# Altium PCB PCB_V0.PcbDoc (part 3 of 4)
Units mm, origin at the board's own origin, x right, y up, seen from the top; angles counter-clockwise.
Board outline 107.95 x 48.89 mm, 4 copper layers (Top Layer, Layer 1, Layer 2, Bottom Layer), stack 1.586 mm thick; 377 components, 276 nets, 880 pads, 284 vias.
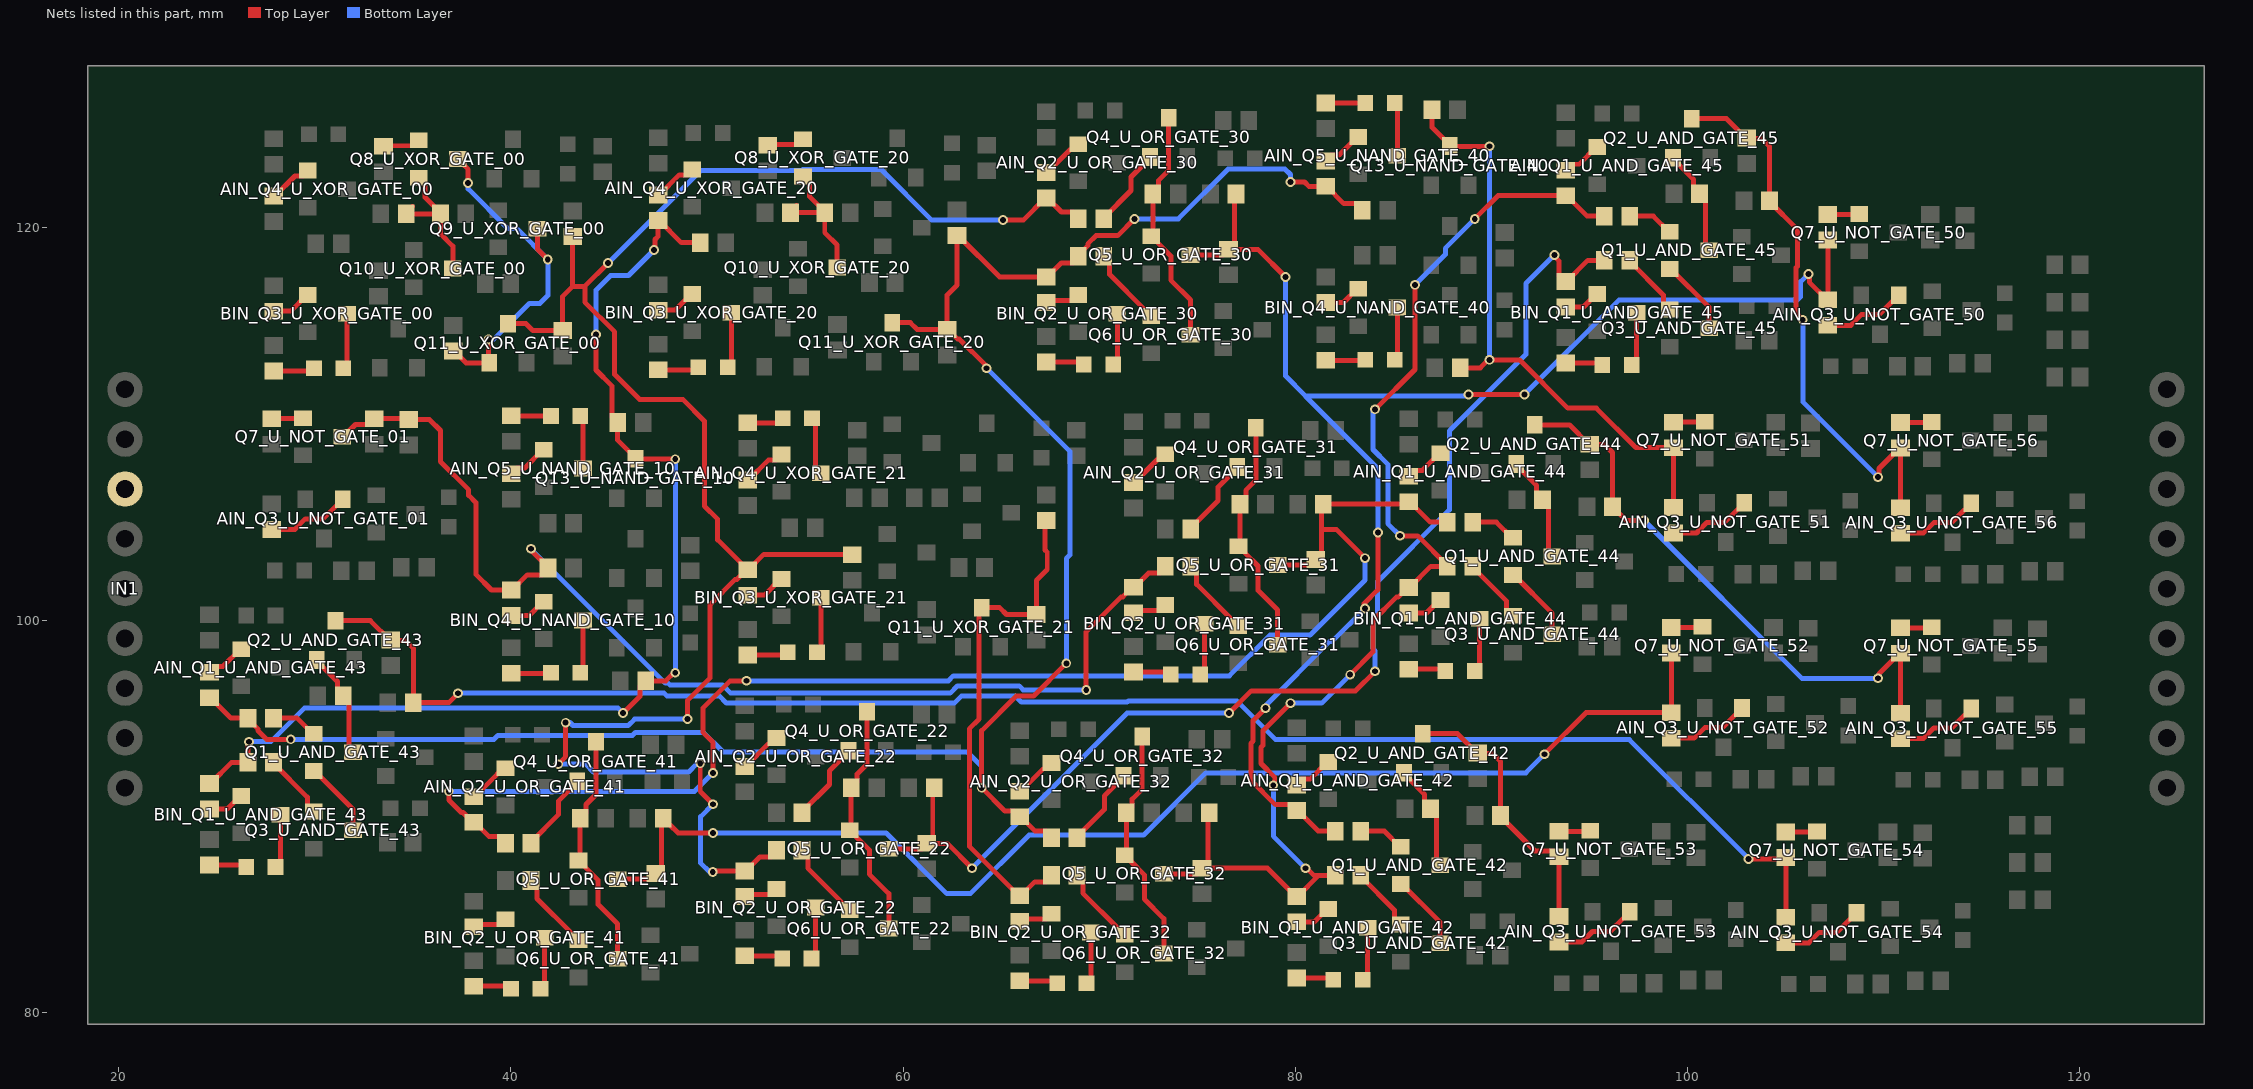
[diagram p5: the nets of this part, all layers, seen from the top]

## Via types
v1: diameter 0.5, hole 0.3, Top Layer to Bottom Layer, 284 vias

## Nets (pads, with @x,y where several pads share a name; then routed paths per layer and width w, separated by ;. In a path a pad name is that pad's centre, name@x,y a point inside that pad or via, vN(x,y) a via of type N, cw(c..) or ccw(c..) an arc to the next point about the centre after c; other vN are vias at no path point) (continued)
NetAIN_D4_U_XOR_GATE_21_1: AIN_D4_U_XOR_GATE_21.1 AIN_RD4_U_XOR_GATE_21.2 | length 1.9
  Top Layer w0.254: AIN_RD4_U_XOR_GATE_21.2@52.07,110.058 53.621,110.058 AIN_D4_U_XOR_GATE_21.1@53.86,110.297
NetAIN_D4_U_XOR_GATE_21_2: AIN_D4_U_XOR_GATE_21.2 AIN_Q4_U_XOR_GATE_21.3 | length 3
  Top Layer w0.254: AIN_D4_U_XOR_GATE_21.2@55.36,110.297 55.53,110.127 55.53,107.761 AIN_Q4_U_XOR_GATE_21.3@55.803,107.488
NetAIN_D5_U_NAND_GATE_10_1: AIN_D5_U_NAND_GATE_10.1 AIN_RD5_U_NAND_GATE_10.2 | length 2
  Top Layer w0.254: AIN_RD5_U_NAND_GATE_10.2@40.02,110.412 42.039,110.412 AIN_D5_U_NAND_GATE_10.1@42.043,110.408
NetAIN_D5_U_NAND_GATE_10_2: AIN_D5_U_NAND_GATE_10.2 AIN_Q5_U_NAND_GATE_10.3 | length 2.7
  Top Layer w0.254: AIN_D5_U_NAND_GATE_10.2@43.543,110.408 43.678,110.273 AIN_Q5_U_NAND_GATE_10.3@43.678,107.726
NetAIN_D5_U_NAND_GATE_40_1: AIN_D5_U_NAND_GATE_40.1 AIN_RD5_U_NAND_GATE_40.2 | length 2
  Top Layer w0.254: AIN_RD5_U_NAND_GATE_40.2@81.555,126.37 83.574,126.37 AIN_D5_U_NAND_GATE_40.1@83.578,126.366
NetAIN_D5_U_NAND_GATE_40_2: AIN_D5_U_NAND_GATE_40.2 AIN_Q5_U_NAND_GATE_40.3 | length 2.7
  Top Layer w0.254: AIN_D5_U_NAND_GATE_40.2@85.078,126.366 85.213,126.231 AIN_Q5_U_NAND_GATE_40.3@85.213,123.684
NetAIN_Q1_U_AND_GATE_42_1: AIN_Q1_U_AND_GATE_42.1 AIN_R1_U_AND_GATE_42.1 | length 2.1
  Top Layer w0.254: AIN_R1_U_AND_GATE_42.1@80.075,91.581 80.373,91.879 80.766,91.879 81.642,92.755 AIN_Q1_U_AND_GATE_42.1@81.692,92.755
NetAIN_Q1_U_AND_GATE_43_1: AIN_Q1_U_AND_GATE_43.1 AIN_R1_U_AND_GATE_43.1 | length 2.1
  Top Layer w0.254: AIN_R1_U_AND_GATE_43.1@24.627,97.342 24.925,97.64 25.318,97.64 26.194,98.516 AIN_Q1_U_AND_GATE_43.1@26.244,98.516
NetAIN_Q1_U_AND_GATE_44_1: AIN_Q1_U_AND_GATE_44.1 AIN_R1_U_AND_GATE_44.1 | length 2.1
  Top Layer w0.254: AIN_R1_U_AND_GATE_44.1@85.791,107.335 86.089,107.633 86.482,107.633 87.358,108.509 AIN_Q1_U_AND_GATE_44.1@87.408,108.509
NetAIN_Q1_U_AND_GATE_45_1: AIN_Q1_U_AND_GATE_45.1 AIN_R1_U_AND_GATE_45.1 | length 2.1
  Top Layer w0.254: AIN_R1_U_AND_GATE_45.1@93.795,122.946 94.093,123.244 94.486,123.244 95.362,124.12 AIN_Q1_U_AND_GATE_45.1@95.412,124.12
NetAIN_Q2_U_OR_GATE_22_1: AIN_Q2_U_OR_GATE_22.1 AIN_R2_U_OR_GATE_22.1 | length 2.2
  Top Layer w0.254: AIN_R2_U_OR_GATE_22.1@51.926,92.532 51.976,92.532 53.151,93.707 53.273,93.707 AIN_Q2_U_OR_GATE_22.1@53.546,93.98
NetAIN_Q2_U_OR_GATE_30_1: AIN_Q2_U_OR_GATE_30.1 AIN_R2_U_OR_GATE_30.1 | length 2.2
  Top Layer w0.254: AIN_R2_U_OR_GATE_30.1@67.31,122.824 67.36,122.824 68.535,123.999 68.657,123.999 AIN_Q2_U_OR_GATE_30.1@68.93,124.272
NetAIN_Q2_U_OR_GATE_31_1: AIN_Q2_U_OR_GATE_31.1 AIN_R2_U_OR_GATE_31.1 | length 2.2
  Top Layer w0.254: AIN_R2_U_OR_GATE_31.1@71.754,107.01 71.804,107.01 72.979,108.185 73.101,108.185 AIN_Q2_U_OR_GATE_31.1@73.374,108.458
NetAIN_Q2_U_OR_GATE_32_1: AIN_Q2_U_OR_GATE_32.1 AIN_R2_U_OR_GATE_32.1 | length 2.2
  Top Layer w0.254: AIN_R2_U_OR_GATE_32.1@65.954,91.262 66.004,91.262 67.179,92.437 67.301,92.437 AIN_Q2_U_OR_GATE_32.1@67.574,92.71
NetAIN_Q2_U_OR_GATE_41_1: AIN_Q2_U_OR_GATE_41.1 AIN_R2_U_OR_GATE_41.1 | length 2.2
  Top Layer w0.254: AIN_R2_U_OR_GATE_41.1@38.1,90.989 38.15,90.989 39.325,92.164 39.447,92.164 AIN_Q2_U_OR_GATE_41.1@39.72,92.437
NetAIN_Q3_U_NOT_GATE_01_1: AIN_Q3_U_NOT_GATE_01.1 AIN_R3_U_NOT_GATE_01.1 | length 4.3
  Top Layer w0.254: AIN_R3_U_NOT_GATE_01.1@27.81,104.618 28.977,104.618 29.515,105.156 30.415,105.156 31.092,105.833 31.142,105.833 31.415,106.106 AIN_Q3_U_NOT_GATE_01.1@31.415,106.156
NetAIN_Q3_U_NOT_GATE_50_1: AIN_Q3_U_NOT_GATE_50.1 AIN_R3_U_NOT_GATE_50.1 | length 4.3
  Top Layer w0.254: AIN_R3_U_NOT_GATE_50.1@107.17,115.032 108.337,115.032 108.875,115.57 109.775,115.57 110.452,116.247 110.502,116.247 110.775,116.52 AIN_Q3_U_NOT_GATE_50.1@110.775,116.57
NetAIN_Q3_U_NOT_GATE_51_1: AIN_Q3_U_NOT_GATE_51.1 AIN_R3_U_NOT_GATE_51.1 | length 4.3
  Top Layer w0.254: AIN_R3_U_NOT_GATE_51.1@99.296,104.44 100.463,104.44 101.001,104.978 101.901,104.978 102.578,105.655 102.628,105.655 102.901,105.928 AIN_Q3_U_NOT_GATE_51.1@102.901,105.978
NetAIN_Q3_U_NOT_GATE_52_1: AIN_Q3_U_NOT_GATE_52.1 AIN_R3_U_NOT_GATE_52.1 | length 4.3
  Top Layer w0.254: AIN_R3_U_NOT_GATE_52.1@99.184,93.971 100.351,93.971 100.889,94.509 101.789,94.509 102.466,95.186 102.516,95.186 102.789,95.459 AIN_Q3_U_NOT_GATE_52.1@102.789,95.509
NetAIN_Q3_U_NOT_GATE_53_1: AIN_Q3_U_NOT_GATE_53.1 AIN_R3_U_NOT_GATE_53.1 | length 4.3
  Top Layer w0.254: AIN_R3_U_NOT_GATE_53.1@93.454,83.574 94.621,83.574 95.159,84.112 96.059,84.112 96.736,84.789 96.786,84.789 97.059,85.062 AIN_Q3_U_NOT_GATE_53.1@97.059,85.112
NetAIN_Q3_U_NOT_GATE_54_1: AIN_Q3_U_NOT_GATE_54.1 AIN_R3_U_NOT_GATE_54.1 | length 4.3
  Top Layer w0.254: AIN_R3_U_NOT_GATE_54.1@105.026,83.536 106.193,83.536 106.731,84.074 107.631,84.074 108.308,84.751 108.358,84.751 108.631,85.024 AIN_Q3_U_NOT_GATE_54.1@108.631,85.074
NetAIN_Q3_U_NOT_GATE_55_1: AIN_Q3_U_NOT_GATE_55.1 AIN_R3_U_NOT_GATE_55.1 | length 4.3
  Top Layer w0.254: AIN_R3_U_NOT_GATE_55.1@110.868,93.95 112.035,93.95 112.573,94.488 113.473,94.488 114.15,95.165 114.2,95.165 114.473,95.438 AIN_Q3_U_NOT_GATE_55.1@114.473,95.488
NetAIN_Q3_U_NOT_GATE_56_1: AIN_Q3_U_NOT_GATE_56.1 AIN_R3_U_NOT_GATE_56.1 | length 4.3
  Top Layer w0.254: AIN_R3_U_NOT_GATE_56.1@110.868,104.425 112.035,104.425 112.573,104.963 113.473,104.963 114.15,105.64 114.2,105.64 114.473,105.913 AIN_Q3_U_NOT_GATE_56.1@114.473,105.963
NetAIN_Q4_U_XOR_GATE_00_1: AIN_Q4_U_XOR_GATE_00.1 AIN_R4_U_XOR_GATE_00.1 | length 2.3
  Top Layer w0.254: AIN_R4_U_XOR_GATE_00.1@27.91,121.621 27.96,121.621 28.988,122.649 29.37,122.649 AIN_Q4_U_XOR_GATE_00.1@29.643,122.922
NetAIN_Q4_U_XOR_GATE_20_1: AIN_Q4_U_XOR_GATE_20.1 AIN_R4_U_XOR_GATE_20.1 | length 2.3
  Top Layer w0.254: AIN_R4_U_XOR_GATE_20.1@47.512,121.676 47.562,121.676 48.59,122.704 48.972,122.704 AIN_Q4_U_XOR_GATE_20.1@49.245,122.977
NetAIN_Q4_U_XOR_GATE_21_1: AIN_Q4_U_XOR_GATE_21.1 AIN_R4_U_XOR_GATE_21.1 | length 2.3
  Top Layer w0.254: AIN_R4_U_XOR_GATE_21.1@52.07,107.137 52.12,107.137 53.148,108.165 53.53,108.165 AIN_Q4_U_XOR_GATE_21.1@53.803,108.438
NetAIN_Q5_U_NAND_GATE_10_1: AIN_Q5_U_NAND_GATE_10.1 AIN_R5_U_NAND_GATE_10.1 | length 2.2
  Top Layer w0.254: AIN_R5_U_NAND_GATE_10.1@40.02,107.456 40.318,107.754 40.706,107.754 41.628,108.676 AIN_Q5_U_NAND_GATE_10.1@41.678,108.676
NetAIN_Q5_U_NAND_GATE_40_1: AIN_Q5_U_NAND_GATE_40.1 AIN_R5_U_NAND_GATE_40.1 | length 2.2
  Top Layer w0.254: AIN_R5_U_NAND_GATE_40.1@81.555,123.414 81.853,123.712 82.241,123.712 83.163,124.634 AIN_Q5_U_NAND_GATE_40.1@83.213,124.634
NetAIN_R1_U_AND_GATE_42_2: AIN_R1_U_AND_GATE_42.2 AIN_R3_U_NOT_GATE_50.2 Q5_U_OR_GATE_30.3 R2_U_AND_GATE_42.1 R14_U_NOT_GATE_50.1 RO2_U_OR_GATE_30.1 Y_R2_U_OR_GATE_30.2 | length 77.8
  Top Layer w0.254: Q5_U_OR_GATE_30.3@74.66,118.618 76.316,118.618 Y_R2_U_OR_GATE_30.2@76.6,118.902 ; RO2_U_OR_GATE_30.1@76.978,121.727 76.898,121.647 76.898,119.2 Y_R2_U_OR_GATE_30.2@76.6,118.902 ; v1(78.486,95.504) 77.847,94.865 77.847,93.816 77.743,93.712 77.743,91.819 78.983,90.579 79.777,90.579 AIN_R1_U_AND_GATE_42.2@80.075,90.281 80.125,90.281 81.171,89.235 R2_U_AND_GATE_42.1@82.042,89.235 ; v1(79.502,117.49) 78.09,118.902 Y_R2_U_OR_GATE_30.2@76.6,118.902 ; v1(83.566,100.584) 83.52,100.63 83.52,100.841 84.216,101.537 v1(84.216,104.46) ; v1(88.834,111.506) v1(91.694,111.506) ; v1(106.172,117.648) 106.219,117.601 106.219,117.233 107.12,116.332 AIN_R3_U_NOT_GATE_50.2@107.17,116.332 R14_U_NOT_GATE_50.1@107.17,119.38
  Bottom Layer w0.254: v1(78.486,95.504) 78.486,95.634 81.765,98.913 81.895,98.913 v1(83.566,100.584) ; v1(79.502,117.49) 79.502,112.452 80.518,111.436 ; v1(84.216,104.46) 84.216,107.727 80.518,111.425 80.518,111.436 ; v1(88.834,111.506) 88.764,111.436 80.518,111.436 ; v1(91.694,111.506) 96.52,116.332 105.627,116.332 105.776,116.481 105.776,117.252 v1(106.172,117.648)
NetAIN_R1_U_AND_GATE_43_2: AIN_R1_U_AND_GATE_43.2 AIN_R2_U_OR_GATE_32.2 AIN_R5_U_NAND_GATE_40.2 BIN_R2_U_OR_GATE_30.2 Q11_U_XOR_GATE_20.3 R2_U_AND_GATE_43.1 R11_U_OR_GATE_32.1 R13_U_OR_GATE_30.1 R16_U_XOR_GATE_20.1 R23_U_NAND_GATE_40.1 Y_R4_U_XOR_GATE_20.2 | length 108.4
  Top Layer w0.254: AIN_R1_U_AND_GATE_43.2@24.627,96.042 24.677,96.042 25.723,94.996 R2_U_AND_GATE_43.1@26.594,94.996 26.594,94.946 27.088,94.452 27.088,94.363 27.537,93.914 v1(28.768,93.914) ; Q11_U_XOR_GATE_20.3@59.45,115.168 60.37,115.168 60.72,114.818 R16_U_XOR_GATE_20.1@62.244,114.818 ; v1(64.262,112.842) 64.262,112.939 62.877,114.324 62.788,114.324 62.294,114.818 R16_U_XOR_GATE_20.1@62.244,114.818 ; R11_U_OR_GATE_32.1@67.574,88.895 67.574,88.945 67.276,89.243 66.723,89.243 66.004,89.962 AIN_R2_U_OR_GATE_32.2@65.954,89.962 65.656,90.26 65.188,90.26 v1(64.008,91.44) 64.008,94.36 65.77,96.122 66.658,96.122 v1(68.326,97.79) ; v1(71.804,120.457) 70.948,119.601 69.84,119.601 69.424,119.185 69.424,119.096 68.93,118.602 R13_U_OR_GATE_30.1@68.93,118.552 68.93,118.502 68.632,118.204 68.074,118.204 67.36,117.49 BIN_R2_U_OR_GATE_30.2@67.31,117.49 64.926,117.49 62.802,119.614 Y_R4_U_XOR_GATE_20.2@62.752,119.614 62.752,117.074 62.244,116.566 R16_U_XOR_GATE_20.1@62.244,114.818 ; v1(79.756,122.343) 80.47,122.343 80.699,122.114 AIN_R5_U_NAND_GATE_40.2@81.555,122.114 81.605,122.114 82.481,121.238 83.126,121.238 83.424,120.94 R23_U_NAND_GATE_40.1@83.424,120.89
  Bottom Layer w0.254: v1(28.768,93.914) 39.134,93.914 39.331,94.111 46.192,94.111 46.353,94.272 49.817,94.272 50.821,93.268 63.27,93.268 64.008,92.53 v1(64.008,91.44) ; v1(64.262,112.842) 68.503,108.601 68.503,103.317 68.326,103.14 v1(68.326,97.79) ; v1(71.804,120.457) 74.036,120.457 76.582,123.003 79.473,123.003 79.756,122.72 v1(79.756,122.343)
NetAIN_R1_U_AND_GATE_44_2: AIN_R1_U_AND_GATE_44.2 AIN_R2_U_OR_GATE_41.2 Q5_U_OR_GATE_31.3 R2_U_AND_GATE_44.1 R11_U_OR_GATE_41.1 RO2_U_OR_GATE_31.1 Y_R2_U_OR_GATE_31.2 | length 73.9
  Top Layer w0.254: v1(36.83,91.262) 36.83,90.82 37.467,90.183 37.556,90.183 38.05,89.689 AIN_R2_U_OR_GATE_41.2@38.1,89.689 38.15,89.689 38.869,88.97 39.422,88.97 39.72,88.672 R11_U_OR_GATE_41.1@39.72,88.622 ; v1(50.306,92.202) 50.306,93.757 49.784,94.279 49.784,95.504 51.181,96.901 v1(52.02,96.901) ; Q5_U_OR_GATE_31.3@79.104,102.804 80.76,102.804 Y_R2_U_OR_GATE_31.2@81.044,103.088 81.342,103.386 81.342,104.609 ; v1(83.566,103.154) 82.111,104.609 81.342,104.609 ; R2_U_AND_GATE_44.1@87.758,104.989 86.887,104.989 85.841,106.035 AIN_R1_U_AND_GATE_44.2@85.791,106.035 85.683,105.927 81.436,105.927 RO2_U_OR_GATE_31.1@81.422,105.913 81.342,105.833 81.342,104.609
  Bottom Layer w0.254: v1(36.83,91.262) 49.366,91.262 v1(50.306,92.202) ; v1(52.02,96.901) 62.314,96.901 62.564,97.151 76.639,97.151 78.725,99.237 80.764,99.237 83.566,102.04 v1(83.566,103.154)
NetAIN_R1_U_AND_GATE_45_2: AIN_R1_U_AND_GATE_45.2 BIN_R1_U_AND_GATE_42.2 BIN_R1_U_AND_GATE_44.2 Q5_U_OR_GATE_32.3 R2_U_AND_GATE_45.1 R3_U_AND_GATE_42.1 R3_U_AND_GATE_44.1 RO2_U_OR_GATE_32.1 Y_R2_U_OR_GATE_32.2 | length 65.1
  Top Layer w0.254: Q5_U_OR_GATE_32.3@73.304,87.056 74.96,87.056 Y_R2_U_OR_GATE_32.2@75.244,87.34 ; RO2_U_OR_GATE_32.1@75.622,90.165 75.542,90.085 75.542,87.638 Y_R2_U_OR_GATE_32.2@75.244,87.34 ; v1(78.882,91.572) 78.929,91.619 78.929,91.741 78.957,91.769 78.957,91.979 78.251,92.685 78.251,93.502 78.355,93.606 78.355,94.357 v1(79.756,95.758) ; v1(80.518,87.341) 80.585,87.341 80.947,86.979 81.202,86.979 ; R3_U_AND_GATE_42.1@82.042,86.979 81.202,86.979 ; v1(82.804,97.212) 83.967,98.375 83.967,99.971 85.158,101.162 85.247,101.162 85.741,101.656 BIN_R1_U_AND_GATE_44.2@85.791,101.656 85.841,101.656 86.918,102.733 R3_U_AND_GATE_44.1@87.758,102.733 87.758,102.783 86.246,104.295 v1(85.344,104.295) ; v1(84.074,110.744) 86.106,112.776 v1(86.106,117.094) ; v1(89.154,120.457) 90.343,121.646 AIN_R1_U_AND_GATE_45.2@93.795,121.646 93.845,121.646 94.891,120.6 R2_U_AND_GATE_45.1@95.762,120.6 ; Y_R2_U_OR_GATE_32.2@75.244,87.34 78.587,87.34 80.025,85.902 BIN_R1_U_AND_GATE_42.2@80.075,85.902 80.125,85.902 81.202,86.979
  Bottom Layer w0.254: v1(78.882,91.572) 78.882,88.977 v1(80.518,87.341) ; v1(79.756,95.758) 81.35,95.758 v1(82.804,97.212) ; v1(84.074,110.744) 83.967,110.637 83.967,108.695 84.724,107.938 84.724,104.915 v1(85.344,104.295) ; v1(86.106,117.094) 87.654,118.642 87.654,118.957 v1(89.154,120.457)
NetAIN_R2_U_OR_GATE_30_2: AIN_R2_U_OR_GATE_30.2 BIN_R2_U_OR_GATE_22.2 BIN_R3_U_XOR_GATE_21.2 Q11_U_XOR_GATE_00.3 R11_U_OR_GATE_30.1 R13_U_OR_GATE_22.1 R16_U_XOR_GATE_00.1 R22_U_XOR_GATE_21.1 Y_R4_U_XOR_GATE_00.2 | length 98.4
  Top Layer w0.254: Q11_U_XOR_GATE_00.3@39.848,115.113 40.768,115.113 41.118,114.763 R16_U_XOR_GATE_00.1@42.642,114.763 42.642,116.511 43.15,117.019 ; v1(42.418,92.644) 42.793,93.019 v1(42.793,94.763) ; Y_R4_U_XOR_GATE_00.2@43.15,119.559 43.15,117.019 ; v1(44.958,118.204) 43.773,117.019 ; v1(48.998,94.946) 48.998,95.89 50.161,97.053 50.161,100.795 51.437,102.071 51.526,102.071 BIN_R3_U_XOR_GATE_21.2@52.02,102.565 ; v1(49.656,92.69) 49.656,91.254 v1(50.306,90.604) ; v1(50.292,87.152) 50.338,87.198 BIN_R2_U_OR_GATE_22.2@51.926,87.198 51.976,87.198 52.69,87.912 53.248,87.912 53.546,88.21 R13_U_OR_GATE_22.1@53.546,88.26 ; R22_U_XOR_GATE_21.1@57.404,103.327 57.386,103.345 52.9,103.345 52.12,102.565 BIN_R3_U_XOR_GATE_21.2@52.07,102.565 BIN_R3_U_XOR_GATE_21.2@52.02,102.565 ; v1(65.1,120.396) 66.132,120.396 67.26,121.524 AIN_R2_U_OR_GATE_30.2@67.31,121.524 67.36,121.524 68.079,120.805 68.632,120.805 68.93,120.507 R11_U_OR_GATE_30.1@68.93,120.457 ; 43.15,117.019 43.773,117.019 ; 43.773,117.019 43.773,116.208 45.288,114.693 45.288,112.522 46.558,111.252 48.768,111.252 49.876,110.144 49.876,105.809 50.546,105.139 50.546,104.089 51.722,102.913 51.722,102.863 BIN_R3_U_XOR_GATE_21.2@52.02,102.565
  Bottom Layer w0.254: v1(42.418,92.644) 43.819,92.644 44.215,92.248 49.068,92.248 49.51,92.69 v1(49.656,92.69) ; v1(42.793,94.763) 42.804,94.774 43.015,94.774 43.17,94.619 45.981,94.619 46.308,94.946 v1(48.998,94.946) ; v1(44.958,118.204) 49.69,122.936 54.856,122.936 54.894,122.974 58.89,122.974 61.468,120.396 v1(65.1,120.396) ; v1(50.292,87.152) 50.125,87.152 49.675,87.602 49.675,89.973 v1(50.306,90.604)
NetAIN_R3_U_NOT_GATE_51_2: AIN_R3_U_NOT_GATE_51.2 Q13_U_NAND_GATE_40.3 R14_U_NOT_GATE_51.1 RO4_U_NAND_GATE_40.1 Y_R5_U_NAND_GATE_40.2 | length 31.1
  Top Layer w0.254: RO4_U_NAND_GATE_40.1@86.98,126.031 86.98,125.13 87.884,124.226 Q13_U_NAND_GATE_40.3@87.884,124.176 87.899,124.161 v1(89.916,124.161) ; Y_R5_U_NAND_GATE_40.2@88.413,112.859 89.438,112.859 89.849,113.27 v1(89.916,113.27) 91.44,113.27 93.905,110.805 95.362,110.805 97.379,108.788 R14_U_NOT_GATE_51.1@99.296,108.788 AIN_R3_U_NOT_GATE_51.2@99.296,105.74
  Bottom Layer w0.254: v1(89.916,113.27) v1(89.916,124.161)
NetAIN_R3_U_NOT_GATE_52_2: AIN_R3_U_NOT_GATE_52.2 Q5_U_OR_GATE_41.3 R14_U_NOT_GATE_52.1 RO2_U_OR_GATE_41.1 Y_R2_U_OR_GATE_41.2 | length 65
  Top Layer w0.254: Q5_U_OR_GATE_41.3@45.45,86.783 47.106,86.783 Y_R2_U_OR_GATE_41.2@47.39,87.067 47.688,87.365 47.688,89.812 RO2_U_OR_GATE_41.1@47.768,89.892 47.768,89.842 48.066,89.544 48.116,89.544 48.518,89.142 v1(50.306,89.142) ; v1(92.71,93.152) 94.829,95.271 AIN_R3_U_NOT_GATE_52.2@99.184,95.271 R14_U_NOT_GATE_52.1@99.184,98.319
  Bottom Layer w0.254: v1(50.306,89.142) 59.128,89.142 62.23,86.04 63.434,86.04 66.421,89.027 72.263,89.027 75.439,92.203 91.761,92.203 v1(92.71,93.152)
NetAIN_R3_U_NOT_GATE_53_2: AIN_R3_U_NOT_GATE_53.2 Q2_U_AND_GATE_42.3 R14_U_NOT_GATE_53.1 RO1_U_AND_GATE_42.1 Y_R1_U_AND_GATE_42.2 | length 14.2
  Top Layer w0.254: Q2_U_AND_GATE_42.3@86.502,94.202 88.277,94.202 89.262,93.217 RO1_U_AND_GATE_42.1@89.312,93.217 89.327,93.202 90.058,93.202 90.47,92.79 Y_R1_U_AND_GATE_42.2@90.47,90.027 90.47,89.977 92.227,88.22 93.156,88.22 R14_U_NOT_GATE_53.1@93.454,87.922 AIN_R3_U_NOT_GATE_53.2@93.454,84.874
NetAIN_R3_U_NOT_GATE_54_2: AIN_R3_U_NOT_GATE_54.2 Q2_U_AND_GATE_43.3 R14_U_NOT_GATE_54.1 RO1_U_AND_GATE_43.1 Y_R1_U_AND_GATE_43.2 | length 84.5
  Top Layer w0.254: Q2_U_AND_GATE_43.3@31.054,99.963 32.829,99.963 33.814,98.978 RO1_U_AND_GATE_43.1@33.864,98.978 33.879,98.963 34.61,98.963 35.022,98.551 Y_R1_U_AND_GATE_43.2@35.022,95.788 36.83,95.788 v1(37.308,96.266) ; v1(103.124,87.818) 104.96,87.818 R14_U_NOT_GATE_54.1@105.026,87.884 AIN_R3_U_NOT_GATE_54.2@105.026,84.836
  Bottom Layer w0.254: v1(37.308,96.266) 47.816,96.266 47.947,96.135 50.625,96.135 50.998,95.762 62.612,95.762 62.985,96.135 65.711,96.135 66.04,95.806 71.424,95.806 71.499,95.881 77.023,95.881 79.005,93.899 97.043,93.899 v1(103.124,87.818)
NetAIN_R3_U_NOT_GATE_55_2: AIN_R3_U_NOT_GATE_55.2 Q2_U_AND_GATE_44.3 R14_U_NOT_GATE_55.1 RO1_U_AND_GATE_44.1 Y_R1_U_AND_GATE_44.2 | length 29.3
  Top Layer w0.254: Q2_U_AND_GATE_44.3@92.218,109.956 93.993,109.956 94.978,108.971 RO1_U_AND_GATE_44.1@95.028,108.971 95.043,108.956 95.774,108.956 96.186,108.544 Y_R1_U_AND_GATE_44.2@96.186,105.781 96.186,105.731 96.484,105.433 96.534,105.433 96.892,105.075 v1(97.79,105.075) ; v1(109.728,97.028) 109.775,97.075 109.775,97.255 110.818,98.298 R14_U_NOT_GATE_55.1@110.868,98.298 AIN_R3_U_NOT_GATE_55.2@110.868,95.25
  Bottom Layer w0.254: v1(97.79,105.075) 105.837,97.028 v1(109.728,97.028)
NetAIN_R3_U_NOT_GATE_56_2: AIN_R3_U_NOT_GATE_56.2 Q2_U_AND_GATE_45.3 R14_U_NOT_GATE_56.1 RO1_U_AND_GATE_45.1 Y_R1_U_AND_GATE_45.2 | length 28.8
  Top Layer w0.254: Q2_U_AND_GATE_45.3@100.222,125.567 101.997,125.567 102.982,124.582 RO1_U_AND_GATE_45.1@103.032,124.582 103.047,124.567 103.778,124.567 104.19,124.155 Y_R1_U_AND_GATE_45.2@104.19,121.392 104.19,121.342 105.609,119.923 105.609,118.04 105.541,117.972 105.541,115.663 v1(105.888,115.316) ; v1(109.728,107.285) 109.775,107.332 109.775,107.73 110.818,108.773 R14_U_NOT_GATE_56.1@110.868,108.773 AIN_R3_U_NOT_GATE_56.2@110.868,105.725
  Bottom Layer w0.254: v1(105.888,115.316) 105.888,111.125 v1(109.728,107.285)
NetAIN_R4_U_XOR_GATE_20_2: AIN_R4_U_XOR_GATE_20.2 BIN_R1_U_AND_GATE_43.2 Q13_U_NAND_GATE_10.3 R3_U_AND_GATE_43.1 R21_U_XOR_GATE_20.1 RO4_U_NAND_GATE_10.1 Y_R5_U_NAND_GATE_10.2 | length 57.6
  Top Layer w0.254: BIN_R1_U_AND_GATE_43.2@24.627,91.663 24.677,91.663 25.754,92.74 R3_U_AND_GATE_43.1@26.594,92.74 26.594,93.746 v1(26.64,93.792) ; v1(44.338,114.554) 44.338,112.754 45.147,111.945 45.147,110.371 RO4_U_NAND_GATE_10.1@45.445,110.073 45.445,109.172 46.349,108.268 Q13_U_NAND_GATE_10.3@46.349,108.218 46.364,108.203 v1(48.381,108.203) ; v1(45.72,95.25) 46.58,96.11 46.58,96.603 Y_R5_U_NAND_GATE_10.2@46.878,96.901 47.903,96.901 48.314,97.312 v1(48.381,97.312) ; v1(47.299,118.872) 47.346,118.919 47.346,119.404 47.512,119.57 AIN_R4_U_XOR_GATE_20.2@47.512,120.376 47.562,120.376 48.69,119.248 R21_U_XOR_GATE_20.1@49.656,119.248
  Bottom Layer w0.254: v1(26.64,93.792) 27.754,93.792 29.466,95.504 45.466,95.504 v1(45.72,95.25) ; v1(44.338,114.554) 44.338,116.825 45.086,117.573 46,117.573 v1(47.299,118.872) ; v1(48.381,97.312) 48.383,97.314 48.383,108.201 v1(48.381,108.203)
NetBIN_D1_U_AND_GATE_42_1: BIN_D1_U_AND_GATE_42.1 BIN_RD1_U_AND_GATE_42.2 | length 1.9
  Top Layer w0.254: BIN_RD1_U_AND_GATE_42.2@80.075,81.742 81.845,81.742 BIN_D1_U_AND_GATE_42.1@81.942,81.645
NetBIN_D1_U_AND_GATE_42_2: BIN_D1_U_AND_GATE_42.2 BIN_Q1_U_AND_GATE_42.3 | length 2.8
  Top Layer w0.254: BIN_D1_U_AND_GATE_42.2@83.442,81.645 83.692,81.895 BIN_Q1_U_AND_GATE_42.3@83.692,84.312
NetBIN_D1_U_AND_GATE_43_1: BIN_D1_U_AND_GATE_43.1 BIN_RD1_U_AND_GATE_43.2 | length 1.9
  Top Layer w0.254: BIN_RD1_U_AND_GATE_43.2@24.627,87.503 26.397,87.503 BIN_D1_U_AND_GATE_43.1@26.494,87.406
NetBIN_D1_U_AND_GATE_43_2: BIN_D1_U_AND_GATE_43.2 BIN_Q1_U_AND_GATE_43.3 | length 2.8
  Top Layer w0.254: BIN_D1_U_AND_GATE_43.2@27.994,87.406 28.244,87.656 BIN_Q1_U_AND_GATE_43.3@28.244,90.073
NetBIN_D1_U_AND_GATE_44_1: BIN_D1_U_AND_GATE_44.1 BIN_RD1_U_AND_GATE_44.2 | length 1.9
  Top Layer w0.254: BIN_RD1_U_AND_GATE_44.2@85.791,97.496 87.561,97.496 BIN_D1_U_AND_GATE_44.1@87.658,97.399
NetBIN_D1_U_AND_GATE_44_2: BIN_D1_U_AND_GATE_44.2 BIN_Q1_U_AND_GATE_44.3 | length 2.8
  Top Layer w0.254: BIN_D1_U_AND_GATE_44.2@89.158,97.399 89.408,97.649 BIN_Q1_U_AND_GATE_44.3@89.408,100.066
NetBIN_D1_U_AND_GATE_45_1: BIN_D1_U_AND_GATE_45.1 BIN_RD1_U_AND_GATE_45.2 | length 1.9
  Top Layer w0.254: BIN_RD1_U_AND_GATE_45.2@93.795,113.107 95.565,113.107 BIN_D1_U_AND_GATE_45.1@95.662,113.01
NetBIN_D1_U_AND_GATE_45_2: BIN_D1_U_AND_GATE_45.2 BIN_Q1_U_AND_GATE_45.3 | length 2.8
  Top Layer w0.254: BIN_D1_U_AND_GATE_45.2@97.162,113.01 97.412,113.26 BIN_Q1_U_AND_GATE_45.3@97.412,115.677
NetBIN_D2_U_OR_GATE_22_1: BIN_D2_U_OR_GATE_22.1 BIN_RD2_U_OR_GATE_22.2 | length 2
  Top Layer w0.254: BIN_RD2_U_OR_GATE_22.2@51.926,82.87 53.699,82.87 BIN_D2_U_OR_GATE_22.1@53.831,82.738
NetBIN_D2_U_OR_GATE_22_2: BIN_D2_U_OR_GATE_22.2 BIN_Q2_U_OR_GATE_22.3 | length 2.7
  Top Layer w0.254: BIN_D2_U_OR_GATE_22.2@55.331,82.738 55.546,82.953 BIN_Q2_U_OR_GATE_22.3@55.546,85.335
NetBIN_D2_U_OR_GATE_30_1: BIN_D2_U_OR_GATE_30.1 BIN_RD2_U_OR_GATE_30.2 | length 2
  Top Layer w0.254: BIN_RD2_U_OR_GATE_30.2@67.31,113.162 69.083,113.162 BIN_D2_U_OR_GATE_30.1@69.215,113.03
NetBIN_D2_U_OR_GATE_30_2: BIN_D2_U_OR_GATE_30.2 BIN_Q2_U_OR_GATE_30.3 | length 2.7
  Top Layer w0.254: BIN_D2_U_OR_GATE_30.2@70.715,113.03 70.93,113.245 BIN_Q2_U_OR_GATE_30.3@70.93,115.627
NetBIN_D2_U_OR_GATE_31_1: BIN_D2_U_OR_GATE_31.1 BIN_RD2_U_OR_GATE_31.2 | length 2
  Top Layer w0.254: BIN_RD2_U_OR_GATE_31.2@71.754,97.348 73.527,97.348 BIN_D2_U_OR_GATE_31.1@73.659,97.216
NetBIN_D2_U_OR_GATE_31_2: BIN_D2_U_OR_GATE_31.2 BIN_Q2_U_OR_GATE_31.3 | length 2.7
  Top Layer w0.254: BIN_D2_U_OR_GATE_31.2@75.159,97.216 75.374,97.431 BIN_Q2_U_OR_GATE_31.3@75.374,99.813
NetBIN_D2_U_OR_GATE_32_1: BIN_D2_U_OR_GATE_32.1 BIN_RD2_U_OR_GATE_32.2 | length 2
  Top Layer w0.254: BIN_RD2_U_OR_GATE_32.2@65.954,81.6 67.727,81.6 BIN_D2_U_OR_GATE_32.1@67.859,81.468
NetBIN_D2_U_OR_GATE_32_2: BIN_D2_U_OR_GATE_32.2 BIN_Q2_U_OR_GATE_32.3 | length 2.7
  Top Layer w0.254: BIN_D2_U_OR_GATE_32.2@69.359,81.468 69.574,81.683 BIN_Q2_U_OR_GATE_32.3@69.574,84.065
NetBIN_D2_U_OR_GATE_41_1: BIN_D2_U_OR_GATE_41.1 BIN_RD2_U_OR_GATE_41.2 | length 2
  Top Layer w0.254: BIN_RD2_U_OR_GATE_41.2@38.1,81.327 39.873,81.327 BIN_D2_U_OR_GATE_41.1@40.005,81.195
NetBIN_D2_U_OR_GATE_41_2: BIN_D2_U_OR_GATE_41.2 BIN_Q2_U_OR_GATE_41.3 | length 2.7
  Top Layer w0.254: BIN_D2_U_OR_GATE_41.2@41.505,81.195 41.72,81.41 BIN_Q2_U_OR_GATE_41.3@41.72,83.792
NetBIN_D3_U_XOR_GATE_00_1: BIN_D3_U_XOR_GATE_00.1 BIN_RD3_U_XOR_GATE_00.2 | length 2.1
  Top Layer w0.254: BIN_RD3_U_XOR_GATE_00.2@27.91,112.701 29.812,112.701 BIN_D3_U_XOR_GATE_00.1@29.954,112.843
NetBIN_D3_U_XOR_GATE_00_2: BIN_D3_U_XOR_GATE_00.2 BIN_Q3_U_XOR_GATE_00.3 | length 2.9
  Top Layer w0.254: BIN_D3_U_XOR_GATE_00.2@31.454,112.843 31.643,113.032 BIN_Q3_U_XOR_GATE_00.3@31.643,115.622
NetBIN_D3_U_XOR_GATE_20_1: BIN_D3_U_XOR_GATE_20.1 BIN_RD3_U_XOR_GATE_20.2 | length 2.1
  Top Layer w0.254: BIN_RD3_U_XOR_GATE_20.2@47.512,112.756 49.414,112.756 BIN_D3_U_XOR_GATE_20.1@49.556,112.898
NetBIN_D3_U_XOR_GATE_20_2: BIN_D3_U_XOR_GATE_20.2 BIN_Q3_U_XOR_GATE_20.3 | length 2.9
  Top Layer w0.254: BIN_D3_U_XOR_GATE_20.2@51.056,112.898 51.245,113.087 BIN_Q3_U_XOR_GATE_20.3@51.245,115.677
NetBIN_D3_U_XOR_GATE_21_1: BIN_D3_U_XOR_GATE_21.1 BIN_RD3_U_XOR_GATE_21.2 | length 2.1
  Top Layer w0.254: BIN_RD3_U_XOR_GATE_21.2@52.07,98.217 53.972,98.217 BIN_D3_U_XOR_GATE_21.1@54.114,98.359
NetBIN_D3_U_XOR_GATE_21_2: BIN_D3_U_XOR_GATE_21.2 BIN_Q3_U_XOR_GATE_21.3 | length 2.9
  Top Layer w0.254: BIN_D3_U_XOR_GATE_21.2@55.614,98.359 55.803,98.548 BIN_Q3_U_XOR_GATE_21.3@55.803,101.138
NetBIN_D4_U_NAND_GATE_10_1: BIN_D4_U_NAND_GATE_10.1 BIN_RD4_U_NAND_GATE_10.2 | length 2
  Top Layer w0.254: BIN_RD4_U_NAND_GATE_10.2@40.02,97.282 42.013,97.282 BIN_D4_U_NAND_GATE_10.1@42.043,97.312
NetBIN_D4_U_NAND_GATE_10_2: BIN_D4_U_NAND_GATE_10.2 BIN_Q4_U_NAND_GATE_10.3 | length 2.7
  Top Layer w0.254: BIN_D4_U_NAND_GATE_10.2@43.543,97.312 43.678,97.447 BIN_Q4_U_NAND_GATE_10.3@43.678,99.979
NetBIN_D4_U_NAND_GATE_40_1: BIN_D4_U_NAND_GATE_40.1 BIN_RD4_U_NAND_GATE_40.2 | length 2
  Top Layer w0.254: BIN_RD4_U_NAND_GATE_40.2@81.555,113.24 83.548,113.24 BIN_D4_U_NAND_GATE_40.1@83.578,113.27
NetBIN_D4_U_NAND_GATE_40_2: BIN_D4_U_NAND_GATE_40.2 BIN_Q4_U_NAND_GATE_40.3 | length 2.7
  Top Layer w0.254: BIN_D4_U_NAND_GATE_40.2@85.078,113.27 85.213,113.405 BIN_Q4_U_NAND_GATE_40.3@85.213,115.937
NetBIN_Q1_U_AND_GATE_42_1: BIN_Q1_U_AND_GATE_42.1 BIN_R1_U_AND_GATE_42.1 | length 1.9
  Top Layer w0.254: BIN_R1_U_AND_GATE_42.1@80.075,84.602 80.982,84.602 81.642,85.262 BIN_Q1_U_AND_GATE_42.1@81.692,85.262
NetBIN_Q1_U_AND_GATE_43_1: BIN_Q1_U_AND_GATE_43.1 BIN_R1_U_AND_GATE_43.1 | length 1.9
  Top Layer w0.254: BIN_R1_U_AND_GATE_43.1@24.627,90.363 25.534,90.363 26.194,91.023 BIN_Q1_U_AND_GATE_43.1@26.244,91.023
NetBIN_Q1_U_AND_GATE_44_1: BIN_Q1_U_AND_GATE_44.1 BIN_R1_U_AND_GATE_44.1 | length 1.9
  Top Layer w0.254: BIN_R1_U_AND_GATE_44.1@85.791,100.356 86.698,100.356 87.358,101.016 BIN_Q1_U_AND_GATE_44.1@87.408,101.016
NetBIN_Q1_U_AND_GATE_45_1: BIN_Q1_U_AND_GATE_45.1 BIN_R1_U_AND_GATE_45.1 | length 1.9
  Top Layer w0.254: BIN_R1_U_AND_GATE_45.1@93.795,115.967 94.702,115.967 95.362,116.627 BIN_Q1_U_AND_GATE_45.1@95.412,116.627
NetBIN_Q2_U_OR_GATE_22_1: BIN_Q2_U_OR_GATE_22.1 BIN_R2_U_OR_GATE_22.1 | length 1.8
  Top Layer w0.254: BIN_R2_U_OR_GATE_22.1@51.926,85.898 52.04,86.012 53.273,86.012 BIN_Q2_U_OR_GATE_22.1@53.546,86.285
NetBIN_Q2_U_OR_GATE_30_1: BIN_Q2_U_OR_GATE_30.1 BIN_R2_U_OR_GATE_30.1 | length 1.8
  Top Layer w0.254: BIN_R2_U_OR_GATE_30.1@67.31,116.19 67.424,116.304 68.657,116.304 BIN_Q2_U_OR_GATE_30.1@68.93,116.577
NetBIN_Q2_U_OR_GATE_31_1: BIN_Q2_U_OR_GATE_31.1 BIN_R2_U_OR_GATE_31.1 | length 1.8
  Top Layer w0.254: BIN_R2_U_OR_GATE_31.1@71.754,100.376 71.868,100.49 73.101,100.49 BIN_Q2_U_OR_GATE_31.1@73.374,100.763
NetBIN_Q2_U_OR_GATE_32_1: BIN_Q2_U_OR_GATE_32.1 BIN_R2_U_OR_GATE_32.1 | length 1.8
  Top Layer w0.254: BIN_R2_U_OR_GATE_32.1@65.954,84.628 66.068,84.742 67.301,84.742 BIN_Q2_U_OR_GATE_32.1@67.574,85.015
NetBIN_Q2_U_OR_GATE_41_1: BIN_Q2_U_OR_GATE_41.1 BIN_R2_U_OR_GATE_41.1 | length 1.8
  Top Layer w0.254: BIN_R2_U_OR_GATE_41.1@38.1,84.355 38.214,84.469 39.447,84.469 BIN_Q2_U_OR_GATE_41.1@39.72,84.742
NetBIN_Q3_U_XOR_GATE_00_1: BIN_Q3_U_XOR_GATE_00.1 BIN_R3_U_XOR_GATE_00.1 | length 2.1
  Top Layer w0.254: BIN_R3_U_XOR_GATE_00.1@27.91,115.749 28.77,115.749 29.593,116.572 BIN_Q3_U_XOR_GATE_00.1@29.643,116.572
NetBIN_Q3_U_XOR_GATE_20_1: BIN_Q3_U_XOR_GATE_20.1 BIN_R3_U_XOR_GATE_20.1 | length 2.1
  Top Layer w0.254: BIN_R3_U_XOR_GATE_20.1@47.512,115.804 48.372,115.804 49.195,116.627 BIN_Q3_U_XOR_GATE_20.1@49.245,116.627
NetBIN_Q3_U_XOR_GATE_21_1: BIN_Q3_U_XOR_GATE_21.1 BIN_R3_U_XOR_GATE_21.1 | length 2.1
  Top Layer w0.254: BIN_R3_U_XOR_GATE_21.1@52.07,101.265 52.93,101.265 53.753,102.088 BIN_Q3_U_XOR_GATE_21.1@53.803,102.088
NetBIN_Q4_U_NAND_GATE_10_1: BIN_Q4_U_NAND_GATE_10.1 BIN_R4_U_NAND_GATE_10.1 | length 1.9
  Top Layer w0.254: BIN_R4_U_NAND_GATE_10.1@40.02,100.233 40.932,100.233 41.628,100.929 BIN_Q4_U_NAND_GATE_10.1@41.678,100.929
NetBIN_Q4_U_NAND_GATE_40_1: BIN_Q4_U_NAND_GATE_40.1 BIN_R4_U_NAND_GATE_40.1 | length 1.9
  Top Layer w0.254: BIN_R4_U_NAND_GATE_40.1@81.555,116.191 82.467,116.191 83.163,116.887 BIN_Q4_U_NAND_GATE_40.1@83.213,116.887
NetBIN_R1_U_AND_GATE_45_2: BIN_R1_U_AND_GATE_45.2 Q5_U_OR_GATE_22.3 R3_U_AND_GATE_45.1 RO2_U_OR_GATE_22.1 Y_R2_U_OR_GATE_22.2 | length 61.7
  Top Layer w0.254: Q5_U_OR_GATE_22.3@59.276,88.326 60.932,88.326 Y_R2_U_OR_GATE_22.2@61.216,88.61 ; RO2_U_OR_GATE_22.1@61.594,91.435 61.514,91.355 61.514,88.908 Y_R2_U_OR_GATE_22.2@61.216,88.61 ; v1(63.516,87.341) 62.247,88.61 Y_R2_U_OR_GATE_22.2@61.216,88.61 ; v1(76.622,95.25) 77.761,96.389 83.079,96.389 v1(84.074,97.384) ; v1(93.218,118.618) 93.218,118.551 93.447,118.322 93.447,117.565 93.745,117.267 BIN_R1_U_AND_GATE_45.2@93.795,117.267 93.845,117.267 94.922,118.344 R3_U_AND_GATE_45.1@95.762,118.344
  Bottom Layer w0.254: v1(63.516,87.341) 71.425,95.25 v1(76.622,95.25) ; v1(84.074,97.384) 84.074,98.428 83.967,98.535 83.967,100.093 84.197,100.323 84.197,101.952 87.863,105.619 87.863,109.641 91.76,113.538 91.76,117.16 v1(93.218,118.618)
NetBIN_R2_U_OR_GATE_31_2: BIN_R2_U_OR_GATE_31.2 BIN_R4_U_NAND_GATE_10.2 Q7_U_NOT_GATE_01.3 R13_U_OR_GATE_31.1 R24_U_NAND_GATE_10.1 RO3_U_NOT_GATE_01.1 Y_R3_U_NOT_GATE_01.2 | length 59.6
  Top Layer w0.254: Q7_U_NOT_GATE_01.3@31.399,109.346 31.449,109.346 32.071,109.968 32.722,109.968 RO3_U_NOT_GATE_01.1@33.02,110.266 34.756,110.266 Y_R3_U_NOT_GATE_01.2@34.798,110.224 35.842,110.224 36.404,109.662 36.404,108.078 37.846,106.636 37.846,106.36 38.214,105.992 38.214,102.327 39.008,101.533 BIN_R4_U_NAND_GATE_10.2@40.02,101.533 40.07,101.533 40.838,102.301 41.591,102.301 41.889,102.599 R24_U_NAND_GATE_10.1@41.889,102.649 41.889,102.699 41.017,103.571 v1(41.017,103.632) ; v1(69.342,96.437) 69.342,99.403 71.121,101.182 71.21,101.182 71.704,101.676 BIN_R2_U_OR_GATE_31.2@71.754,101.676 71.804,101.676 72.518,102.39 73.076,102.39 73.374,102.688 R13_U_OR_GATE_31.1@73.374,102.738
  Bottom Layer w0.254: v1(41.017,103.632) 47.875,96.774 48.026,96.774 48.119,96.681 50.797,96.681 51.208,96.27 62.401,96.27 62.774,96.643 65.922,96.643 66.128,96.437 v1(69.342,96.437)
NetBIN_R2_U_OR_GATE_32_2: BIN_R2_U_OR_GATE_32.2 Q11_U_XOR_GATE_21.3 R13_U_OR_GATE_32.1 R16_U_XOR_GATE_21.1 Y_R4_U_XOR_GATE_21.2 | length 26.2
  Top Layer w0.254: Y_R4_U_XOR_GATE_21.2@67.31,105.075 67.241,105.006 67.241,103.573 67.354,103.46 67.354,102.579 66.802,102.027 R16_U_XOR_GATE_21.1@66.802,100.279 65.278,100.279 64.928,100.629 Q11_U_XOR_GATE_21.3@64.008,100.629 63.877,100.498 63.877,94.947 63.377,94.447 63.377,88.455 65.904,85.928 BIN_R2_U_OR_GATE_32.2@65.954,85.928 66.004,85.928 66.718,86.642 67.276,86.642 67.574,86.94 R13_U_OR_GATE_32.1@67.574,86.99
NetIN1_3: IN1.3
NetQ1_U_AND_GATE_42_1: Q1_U_AND_GATE_42.1 R2_U_AND_GATE_42.2 | length 2.4
  Top Layer w0.254: R2_U_AND_GATE_42.2@83.342,89.235 84.542,89.235 85.34,88.437 Q1_U_AND_GATE_42.1@85.39,88.437
NetQ1_U_AND_GATE_42_2: Q1_U_AND_GATE_42.2 Q3_U_AND_GATE_42.3 | length 3.9
  Top Layer w0.254: Q1_U_AND_GATE_42.2@85.39,86.537 85.44,86.537 87.39,84.587 Q3_U_AND_GATE_42.3@87.39,83.52
NetQ1_U_AND_GATE_42_3: Q1_U_AND_GATE_42.3 Q2_U_AND_GATE_42.1 R1_U_AND_GATE_42.1 | length 5.5
  Top Layer w0.254: Q2_U_AND_GATE_42.1@85.552,92.202 85.552,92.152 86.6,91.104 86.6,90.676 R1_U_AND_GATE_42.1@86.898,90.378 87.196,90.08 87.196,87.681 Q1_U_AND_GATE_42.3@87.39,87.487
NetQ1_U_AND_GATE_43_1: Q1_U_AND_GATE_43.1 R2_U_AND_GATE_43.2 | length 2.4
  Top Layer w0.254: R2_U_AND_GATE_43.2@27.894,94.996 29.094,94.996 29.892,94.198 Q1_U_AND_GATE_43.1@29.942,94.198
NetQ1_U_AND_GATE_43_2: Q1_U_AND_GATE_43.2 Q3_U_AND_GATE_43.3 | length 3.9
  Top Layer w0.254: Q1_U_AND_GATE_43.2@29.942,92.298 29.992,92.298 31.942,90.348 Q3_U_AND_GATE_43.3@31.942,89.281
NetQ1_U_AND_GATE_43_3: Q1_U_AND_GATE_43.3 Q2_U_AND_GATE_43.1 R1_U_AND_GATE_43.1 | length 5.5
  Top Layer w0.254: Q2_U_AND_GATE_43.1@30.104,97.963 30.104,97.913 31.152,96.865 31.152,96.437 R1_U_AND_GATE_43.1@31.45,96.139 31.748,95.841 31.748,93.442 Q1_U_AND_GATE_43.3@31.942,93.248
NetQ1_U_AND_GATE_44_1: Q1_U_AND_GATE_44.1 R2_U_AND_GATE_44.2 | length 2.4
  Top Layer w0.254: R2_U_AND_GATE_44.2@89.058,104.989 90.258,104.989 91.056,104.191 Q1_U_AND_GATE_44.1@91.106,104.191
NetQ1_U_AND_GATE_44_2: Q1_U_AND_GATE_44.2 Q3_U_AND_GATE_44.3 | length 3.9
  Top Layer w0.254: Q1_U_AND_GATE_44.2@91.106,102.291 91.156,102.291 93.106,100.341 Q3_U_AND_GATE_44.3@93.106,99.274
NetQ1_U_AND_GATE_44_3: Q1_U_AND_GATE_44.3 Q2_U_AND_GATE_44.1 R1_U_AND_GATE_44.1 | length 5.5
  Top Layer w0.254: Q2_U_AND_GATE_44.1@91.268,107.956 91.268,107.906 92.316,106.858 92.316,106.43 R1_U_AND_GATE_44.1@92.614,106.132 92.912,105.834 92.912,103.435 Q1_U_AND_GATE_44.3@93.106,103.241
NetQ1_U_AND_GATE_45_1: Q1_U_AND_GATE_45.1 R2_U_AND_GATE_45.2 | length 2.4
  Top Layer w0.254: R2_U_AND_GATE_45.2@97.062,120.6 98.262,120.6 99.06,119.802 Q1_U_AND_GATE_45.1@99.11,119.802
NetQ1_U_AND_GATE_45_2: Q1_U_AND_GATE_45.2 Q3_U_AND_GATE_45.3 | length 3.9
  Top Layer w0.254: Q1_U_AND_GATE_45.2@99.11,117.902 99.16,117.902 101.11,115.952 Q3_U_AND_GATE_45.3@101.11,114.885
NetQ1_U_AND_GATE_45_3: Q1_U_AND_GATE_45.3 Q2_U_AND_GATE_45.1 R1_U_AND_GATE_45.1 | length 5.5
  Top Layer w0.254: Q2_U_AND_GATE_45.1@99.272,123.567 99.272,123.517 100.32,122.469 100.32,122.041 R1_U_AND_GATE_45.1@100.618,121.743 100.916,121.445 100.916,119.046 Q1_U_AND_GATE_45.3@101.11,118.852
NetQ3_U_AND_GATE_42_1: Q3_U_AND_GATE_42.1 R3_U_AND_GATE_42.2 | length 3.4
  Top Layer w0.254: R3_U_AND_GATE_42.2@83.342,86.979 83.342,86.929 85.067,85.204 85.067,84.743 85.34,84.47 Q3_U_AND_GATE_42.1@85.39,84.47
NetQ3_U_AND_GATE_43_1: Q3_U_AND_GATE_43.1 R3_U_AND_GATE_43.2 | length 3.4
  Top Layer w0.254: R3_U_AND_GATE_43.2@27.894,92.74 27.894,92.69 29.619,90.965 29.619,90.504 29.892,90.231 Q3_U_AND_GATE_43.1@29.942,90.231
NetQ3_U_AND_GATE_44_1: Q3_U_AND_GATE_44.1 R3_U_AND_GATE_44.2 | length 3.4
  Top Layer w0.254: R3_U_AND_GATE_44.2@89.058,102.733 89.058,102.683 90.783,100.958 90.783,100.497 91.056,100.224 Q3_U_AND_GATE_44.1@91.106,100.224
NetQ3_U_AND_GATE_45_1: Q3_U_AND_GATE_45.1 R3_U_AND_GATE_45.2 | length 3.4
  Top Layer w0.254: R3_U_AND_GATE_45.2@97.062,118.344 97.062,118.294 98.787,116.569 98.787,116.108 99.06,115.835 Q3_U_AND_GATE_45.1@99.11,115.835
NetQ4_U_OR_GATE_22_1: Q4_U_OR_GATE_22.1 R11_U_OR_GATE_22.2 | length 4.1
  Top Layer w0.254: R11_U_OR_GATE_22.2@54.846,90.165 54.846,90.215 56.244,91.613 56.244,92.305 57.214,93.275 Q4_U_OR_GATE_22.1@57.214,93.325
NetQ4_U_OR_GATE_22_3: Q4_U_OR_GATE_22.3 Q5_U_OR_GATE_22.1 Q6_U_OR_GATE_22.3 R12_U_OR_GATE_22.1 | length 12.3
  Top Layer w0.254: Q4_U_OR_GATE_22.3@58.164,95.325 58.164,92.644 57.654,92.134 57.654,91.733 R12_U_OR_GATE_22.1@57.356,91.435 57.356,89.356 Q5_U_OR_GATE_22.1@57.276,89.276 57.326,89.276 57.599,89.003 57.599,88.953 58.276,88.276 58.276,87.037 59.273,86.04 Q6_U_OR_GATE_22.3@59.273,84.262
NetQ4_U_OR_GATE_30_1: Q4_U_OR_GATE_30.1 R11_U_OR_GATE_30.2 | length 4.1
  Top Layer w0.254: R11_U_OR_GATE_30.2@70.23,120.457 70.23,120.507 71.628,121.905 71.628,122.597 72.598,123.567 Q4_U_OR_GATE_30.1@72.598,123.617
NetQ4_U_OR_GATE_30_3: Q4_U_OR_GATE_30.3 Q5_U_OR_GATE_30.1 Q6_U_OR_GATE_30.3 R12_U_OR_GATE_30.1 | length 12.3
  Top Layer w0.254: Q4_U_OR_GATE_30.3@73.548,125.617 73.548,122.936 73.038,122.426 73.038,122.025 R12_U_OR_GATE_30.1@72.74,121.727 72.74,119.648 Q5_U_OR_GATE_30.1@72.66,119.568 72.71,119.568 72.983,119.295 72.983,119.245 73.66,118.568 73.66,117.329 74.657,116.332 Q6_U_OR_GATE_30.3@74.657,114.554
NetQ4_U_OR_GATE_31_1: Q4_U_OR_GATE_31.1 R11_U_OR_GATE_31.2 | length 4.1
  Top Layer w0.254: R11_U_OR_GATE_31.2@74.674,104.643 74.674,104.693 76.072,106.091 76.072,106.783 77.042,107.753 Q4_U_OR_GATE_31.1@77.042,107.803
NetQ4_U_OR_GATE_31_3: Q4_U_OR_GATE_31.3 Q5_U_OR_GATE_31.1 Q6_U_OR_GATE_31.3 R12_U_OR_GATE_31.1 | length 12.3
  Top Layer w0.254: Q4_U_OR_GATE_31.3@77.992,109.803 77.992,107.122 77.482,106.612 77.482,106.211 R12_U_OR_GATE_31.1@77.184,105.913 77.184,103.834 Q5_U_OR_GATE_31.1@77.104,103.754 77.154,103.754 77.427,103.481 77.427,103.431 78.104,102.754 78.104,101.515 79.101,100.518 Q6_U_OR_GATE_31.3@79.101,98.74
NetQ4_U_OR_GATE_32_1: Q4_U_OR_GATE_32.1 R11_U_OR_GATE_32.2 | length 4.1
  Top Layer w0.254: R11_U_OR_GATE_32.2@68.874,88.895 68.874,88.945 70.272,90.343 70.272,91.035 71.242,92.005 Q4_U_OR_GATE_32.1@71.242,92.055
NetQ4_U_OR_GATE_32_3: Q4_U_OR_GATE_32.3 Q5_U_OR_GATE_32.1 Q6_U_OR_GATE_32.3 R12_U_OR_GATE_32.1 | length 12.3
  Top Layer w0.254: Q4_U_OR_GATE_32.3@72.192,94.055 72.192,91.374 71.682,90.864 71.682,90.463 R12_U_OR_GATE_32.1@71.384,90.165 71.384,88.086 Q5_U_OR_GATE_32.1@71.304,88.006 71.354,88.006 71.627,87.733 71.627,87.683 72.304,87.006 72.304,85.767 73.301,84.77 Q6_U_OR_GATE_32.3@73.301,82.992
NetQ4_U_OR_GATE_41_1: Q4_U_OR_GATE_41.1 R11_U_OR_GATE_41.2 | length 4.1
  Top Layer w0.254: R11_U_OR_GATE_41.2@41.02,88.622 41.02,88.672 42.418,90.07 42.418,90.759 43.059,91.4 43.059,91.403 43.388,91.732 Q4_U_OR_GATE_41.1@43.388,91.782
NetQ4_U_OR_GATE_41_3: Q4_U_OR_GATE_41.3 Q5_U_OR_GATE_41.1 Q6_U_OR_GATE_41.3 R12_U_OR_GATE_41.1 | length 12.3
  Top Layer w0.254: Q4_U_OR_GATE_41.3@44.338,93.782 44.338,91.101 43.828,90.591 43.828,90.19 R12_U_OR_GATE_41.1@43.53,89.892 43.53,87.813 Q5_U_OR_GATE_41.1@43.45,87.733 43.5,87.733 43.773,87.46 43.773,87.41 44.45,86.733 44.45,85.494 45.447,84.497 Q6_U_OR_GATE_41.3@45.447,82.719
NetQ6_U_OR_GATE_22_1: Q6_U_OR_GATE_22.1 R13_U_OR_GATE_22.2 | length 4.1
  Top Layer w0.254: R13_U_OR_GATE_22.2@54.846,88.26 55.144,87.962 55.144,87.341 56.95,85.535 56.95,85.485 57.223,85.212 Q6_U_OR_GATE_22.1@57.273,85.212
NetQ6_U_OR_GATE_30_1: Q6_U_OR_GATE_30.1 R13_U_OR_GATE_30.2 | length 4.1
  Top Layer w0.254: R13_U_OR_GATE_30.2@70.23,118.552 70.528,118.254 70.528,117.633 72.334,115.827 72.334,115.777 72.607,115.504 Q6_U_OR_GATE_30.1@72.657,115.504
NetQ6_U_OR_GATE_31_1: Q6_U_OR_GATE_31.1 R13_U_OR_GATE_31.2 | length 4.1
  Top Layer w0.254: R13_U_OR_GATE_31.2@74.674,102.738 74.972,102.44 74.972,101.819 76.778,100.013 76.778,99.963 77.051,99.69 Q6_U_OR_GATE_31.1@77.101,99.69
NetQ6_U_OR_GATE_32_1: Q6_U_OR_GATE_32.1 R13_U_OR_GATE_32.2 | length 4.1
  Top Layer w0.254: R13_U_OR_GATE_32.2@68.874,86.99 69.172,86.692 69.172,86.071 70.978,84.265 70.978,84.215 71.251,83.942 Q6_U_OR_GATE_32.1@71.301,83.942
NetQ6_U_OR_GATE_41_1: Q6_U_OR_GATE_41.1 R13_U_OR_GATE_41.2 | length 4.1
  Top Layer w0.254: R13_U_OR_GATE_41.2@41.02,86.717 41.318,86.419 41.318,85.798 43.124,83.992 43.124,83.942 43.397,83.669 Q6_U_OR_GATE_41.1@43.447,83.669
NetQ7_U_NOT_GATE_01_1: Q7_U_NOT_GATE_01.1 R14_U_NOT_GATE_01.2 | length 1.6
  Top Layer w0.254: R14_U_NOT_GATE_01.2@27.81,110.266 29.369,110.266 Q7_U_NOT_GATE_01.1@29.399,110.296
NetQ7_U_NOT_GATE_50_1: Q7_U_NOT_GATE_50.1 R14_U_NOT_GATE_50.2 | length 1.6
  Top Layer w0.254: R14_U_NOT_GATE_50.2@107.17,120.68 108.729,120.68 Q7_U_NOT_GATE_50.1@108.759,120.71
NetQ7_U_NOT_GATE_51_1: Q7_U_NOT_GATE_51.1 R14_U_NOT_GATE_51.2 | length 1.6
  Top Layer w0.254: R14_U_NOT_GATE_51.2@99.296,110.088 100.855,110.088 Q7_U_NOT_GATE_51.1@100.885,110.118
NetQ7_U_NOT_GATE_52_1: Q7_U_NOT_GATE_52.1 R14_U_NOT_GATE_52.2 | length 1.6
  Top Layer w0.254: R14_U_NOT_GATE_52.2@99.184,99.619 100.743,99.619 Q7_U_NOT_GATE_52.1@100.773,99.649
NetQ7_U_NOT_GATE_53_1: Q7_U_NOT_GATE_53.1 R14_U_NOT_GATE_53.2 | length 1.6
  Top Layer w0.254: R14_U_NOT_GATE_53.2@93.454,89.222 95.013,89.222 Q7_U_NOT_GATE_53.1@95.043,89.252
NetQ7_U_NOT_GATE_54_1: Q7_U_NOT_GATE_54.1 R14_U_NOT_GATE_54.2 | length 1.6
  Top Layer w0.254: R14_U_NOT_GATE_54.2@105.026,89.184 106.585,89.184 Q7_U_NOT_GATE_54.1@106.615,89.214
NetQ7_U_NOT_GATE_55_1: Q7_U_NOT_GATE_55.1 R14_U_NOT_GATE_55.2 | length 1.6
  Top Layer w0.254: R14_U_NOT_GATE_55.2@110.868,99.598 112.427,99.598 Q7_U_NOT_GATE_55.1@112.457,99.628
NetQ7_U_NOT_GATE_56_1: Q7_U_NOT_GATE_56.1 R14_U_NOT_GATE_56.2 | length 1.6
  Top Layer w0.254: R14_U_NOT_GATE_56.2@110.868,110.073 112.427,110.073 Q7_U_NOT_GATE_56.1@112.457,110.103
NetQ8_U_XOR_GATE_00_1: Q8_U_XOR_GATE_00.1 R17_U_XOR_GATE_00.2 | length 1.9
  Top Layer w0.254: R17_U_XOR_GATE_00.2@33.498,124.161 33.525,124.188 35.019,124.188 Q8_U_XOR_GATE_00.1@35.292,124.461
NetQ8_U_XOR_GATE_00_2: Q8_U_XOR_GATE_00.2 Q10_U_XOR_GATE_00.3 R18_U_XOR_GATE_00.1 R19_U_XOR_GATE_00.1 | length 8.1
  Top Layer w0.254: R19_U_XOR_GATE_00.1@34.969,121.08 34.656,120.767 R19_U_XOR_GATE_00.1@34.656,120.717 R18_U_XOR_GATE_00.1@36.404,120.717 ; Q8_U_XOR_GATE_00.2@34.969,122.288 35.242,122.561 Q8_U_XOR_GATE_00.2@35.292,122.561 35.342,122.561 35.615,122.288 35.615,121.556 36.404,120.767 R18_U_XOR_GATE_00.1@36.404,120.717 ; Q10_U_XOR_GATE_00.3@37.038,117.923 37.038,119.067 36.404,119.701 R18_U_XOR_GATE_00.1@36.404,120.717
NetQ8_U_XOR_GATE_00_3: Q8_U_XOR_GATE_00.3 Q9_U_XOR_GATE_00.3 Q11_U_XOR_GATE_00.1 R15_U_XOR_GATE_00.1 | length 18.3
  Top Layer w0.254: R15_U_XOR_GATE_00.1@37.054,113.717 37.104,113.717 37.708,113.113 Q11_U_XOR_GATE_00.1@38.898,113.113 38.832,113.179 38.853,113.2 v1(38.853,114.3) ; Q8_U_XOR_GATE_00.3@37.292,123.511 37.342,123.511 37.615,123.238 37.615,123.188 37.816,122.987 v1(37.816,122.288) ; Q9_U_XOR_GATE_00.3@41.306,119.955 Q9_U_XOR_GATE_00.3@41.356,119.955 41.356,118.913 v1(41.88,118.389)
  Bottom Layer w0.254: v1(37.816,122.288) 37.816,121.987 39.848,119.955 40.314,119.955 v1(41.88,118.389) 41.88,116.548 41.477,116.145 40.94,116.145 39.095,114.3 v1(38.853,114.3)
NetQ8_U_XOR_GATE_20_1: Q8_U_XOR_GATE_20.1 R17_U_XOR_GATE_20.2 | length 1.9
  Top Layer w0.254: R17_U_XOR_GATE_20.2@53.1,124.216 53.127,124.243 54.621,124.243 Q8_U_XOR_GATE_20.1@54.894,124.516
NetQ8_U_XOR_GATE_20_2: Q8_U_XOR_GATE_20.2 Q10_U_XOR_GATE_20.3 R18_U_XOR_GATE_20.1 R19_U_XOR_GATE_20.1 | length 8.1
  Top Layer w0.254: R19_U_XOR_GATE_20.1@54.571,121.135 54.258,120.822 R19_U_XOR_GATE_20.1@54.258,120.772 R18_U_XOR_GATE_20.1@56.006,120.772 ; Q8_U_XOR_GATE_20.2@54.571,122.343 54.844,122.616 Q8_U_XOR_GATE_20.2@54.894,122.616 54.944,122.616 55.217,122.343 55.217,121.611 56.006,120.822 R18_U_XOR_GATE_20.1@56.006,120.772 ; Q10_U_XOR_GATE_20.3@56.64,117.978 56.64,119.122 56.006,119.756 R18_U_XOR_GATE_20.1@56.006,120.772